# EAGLE board chipchestra-v05-analog-inputs-1 (EAGLE 8.0.0)
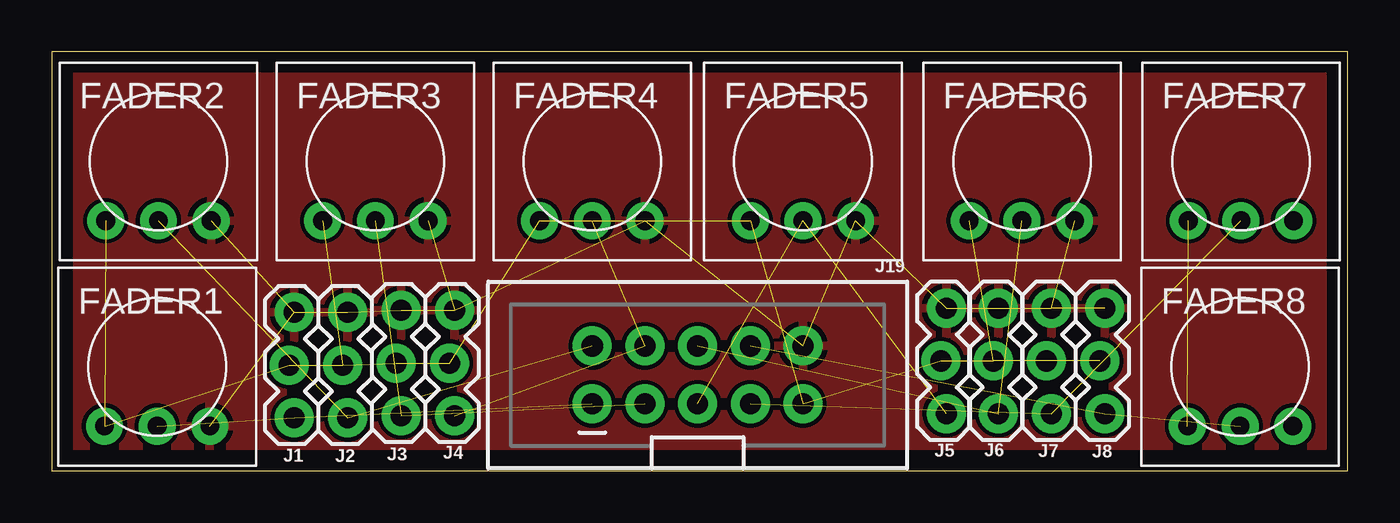
[diagram p0: board, top side]
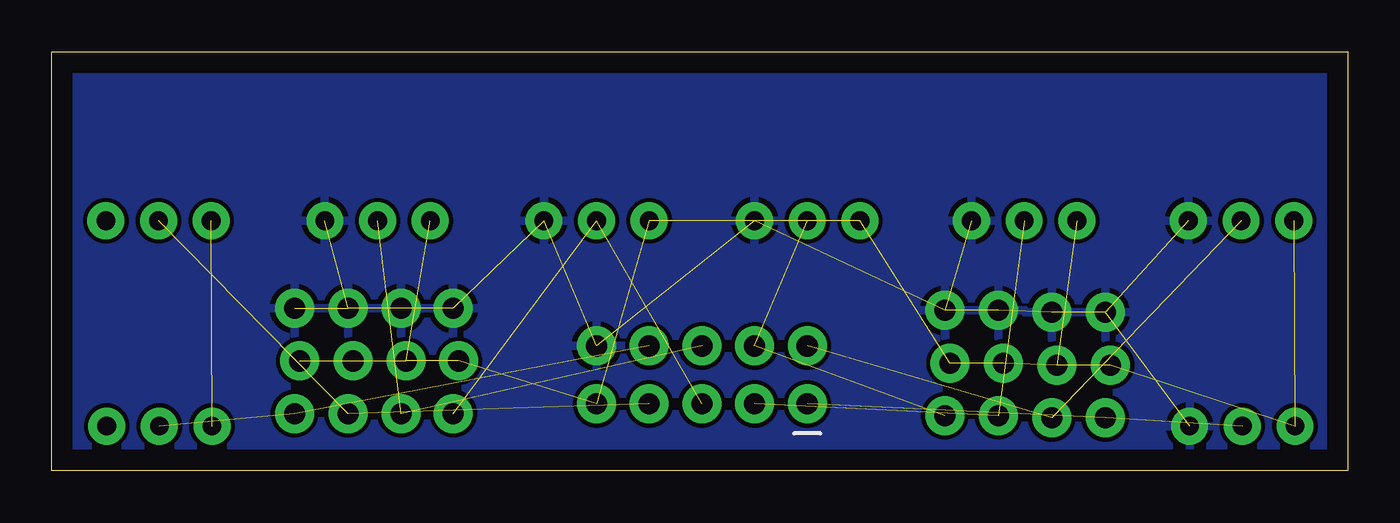
[diagram p1: board, bottom side, seen from below]

Size 62.48 x 20.2 mm. Coordinates in mm from the lower left corner, seen from the top.
Outline: 0,20.2 0,0 62.48,0 62.48,20.2 0,20.2
Copper layers (1*16): Top 0.035mm / dielectric 1.5mm / Bottom 0.035mm
Design rules "default": minimum track width 10mil, minimum drill 24mil, track to track 8mil, track to pad 8mil, pad to pad 8mil, via to via 8mil, smd to smd 8mil, copper to edge 40mil, drill to drill 8mil, minimum pad ring 10mil, minimum via ring 8mil, stop-mask expansion 4mil, vias tented up to drill 0mil, thermal gap 10mil
Net classes: 0 default: width 0.254 mm, clearance 0.152 mm

## Footprints (pad centres in the part's own frame; a part is rotated, then mirrored left to right if it is on the bottom)
TRIM-3386 = drill 0.9 pad 1.778: 1 -2.54,-2.857; 2 0,-2.857; 3 2.54,-2.857
1X03_LOCK = drill 1.016 pad 1.88: 1 0,0.127; 2 2.54,-0.127; 3 5.08,0.127
2X5-SHROUDED_LOCK = drill 1.016 pad 1.88: 1 -1.397,5.08; 2 1.397,5.08; 3 -1.397,2.54; 4 1.397,2.54; 5 -1.397,0; 6 1.397,0; 7 -1.397,-2.54; 8 1.397,-2.54; 9 -1.397,-5.08; 10 1.397,-5.08

## Placement (x,y rotation side)
FADER1  [TRIM-3386]  5.08,5.02 0 top
FADER2  [TRIM-3386]  5.14,14.92 0 top
FADER3  [TRIM-3386]  15.6,14.92 0 top
FADER4  [TRIM-3386]  26.06,14.92 0 top
FADER5  [TRIM-3386]  36.22,14.92 0 top
FADER6  [TRIM-3386]  46.78,14.92 0 top
FADER7  [TRIM-3386]  57.34,14.92 0 top
FADER8  [TRIM-3386]  57.3,5.02 0 top
J1  [1X03_LOCK]  11.56,7.64 270 top
J2  [1X03_LOCK]  14.14,7.64 270 top
J3  [1X03_LOCK]  16.72,7.74 270 top
J4  [1X03_LOCK]  19.3,7.74 270 top
J5  [1X03_LOCK]  43,7.84 270 top
J6  [1X03_LOCK]  45.52,7.84 270 top
J7  [1X03_LOCK]  48.08,7.84 270 top
J8  [1X03_LOCK]  50.66,7.84 270 top
J19  [2X5-SHROUDED_LOCK]  31.14,4.62 90 top

## Library data of the parts
FADER1-FADER8 = adafruit
J1-J8 = SparkFun-Connectors
J19 = SparkFun-Connectors; PROD_ID: CONN-08671; SF_ID: PRT-08506

## Nets
+5V2: FADER7.1 FADER8.1
ANALOG1: FADER1.2 J1.3 J19.1
ANALOG2: FADER2.2 J2.3 J19.2
ANALOG3: FADER3.2 J3.3 J19.3
ANALOG4: FADER4.2 J4.3 J19.4
ANALOG5: FADER5.2 J5.3 J19.5
ANALOG6: FADER6.2 J6.3 J19.6
ANALOG7: FADER7.2 J7.3 J19.7
ANALOG8: FADER8.2 J8.3 J19.8
GND: FADER1.3 FADER2.3 FADER3.3 FADER4.3 FADER5.3 FADER6.3 J1.1 J2.1 J3.1 J4.1 J5.1 J6.1 J7.1 J8.1 J19.10
GND1: FADER7.3
GND2: FADER8.3
VCC: FADER1.1 FADER2.1 FADER3.1 FADER4.1 FADER5.1 FADER6.1 J1.2 J2.2 J3.2 J4.2 J5.2 J6.2 J7.2 J8.2 J19.9

## Tracks (layer width: path | path; a pad name or v marks a point on that pad's centre or on a via)
+5V2  (1 unrouted)
ANALOG1  (2 unrouted)
ANALOG2  (2 unrouted)
ANALOG3  (2 unrouted)
ANALOG4  (2 unrouted)
ANALOG5  (2 unrouted)
ANALOG6  (2 unrouted)
ANALOG7  (2 unrouted)
ANALOG8  (2 unrouted)
GND  (14 unrouted)
  pour Top: 64.55,21.57 64.55,-1.29 -2.54,-1.29 -2.54,21.57
  pour Bottom: 64.55,21.57 64.55,-1.29 -2.54,-1.29 -2.54,21.57
VCC  (14 unrouted)